# EAGLE board humidity-v2.2 (EAGLE 5.11)
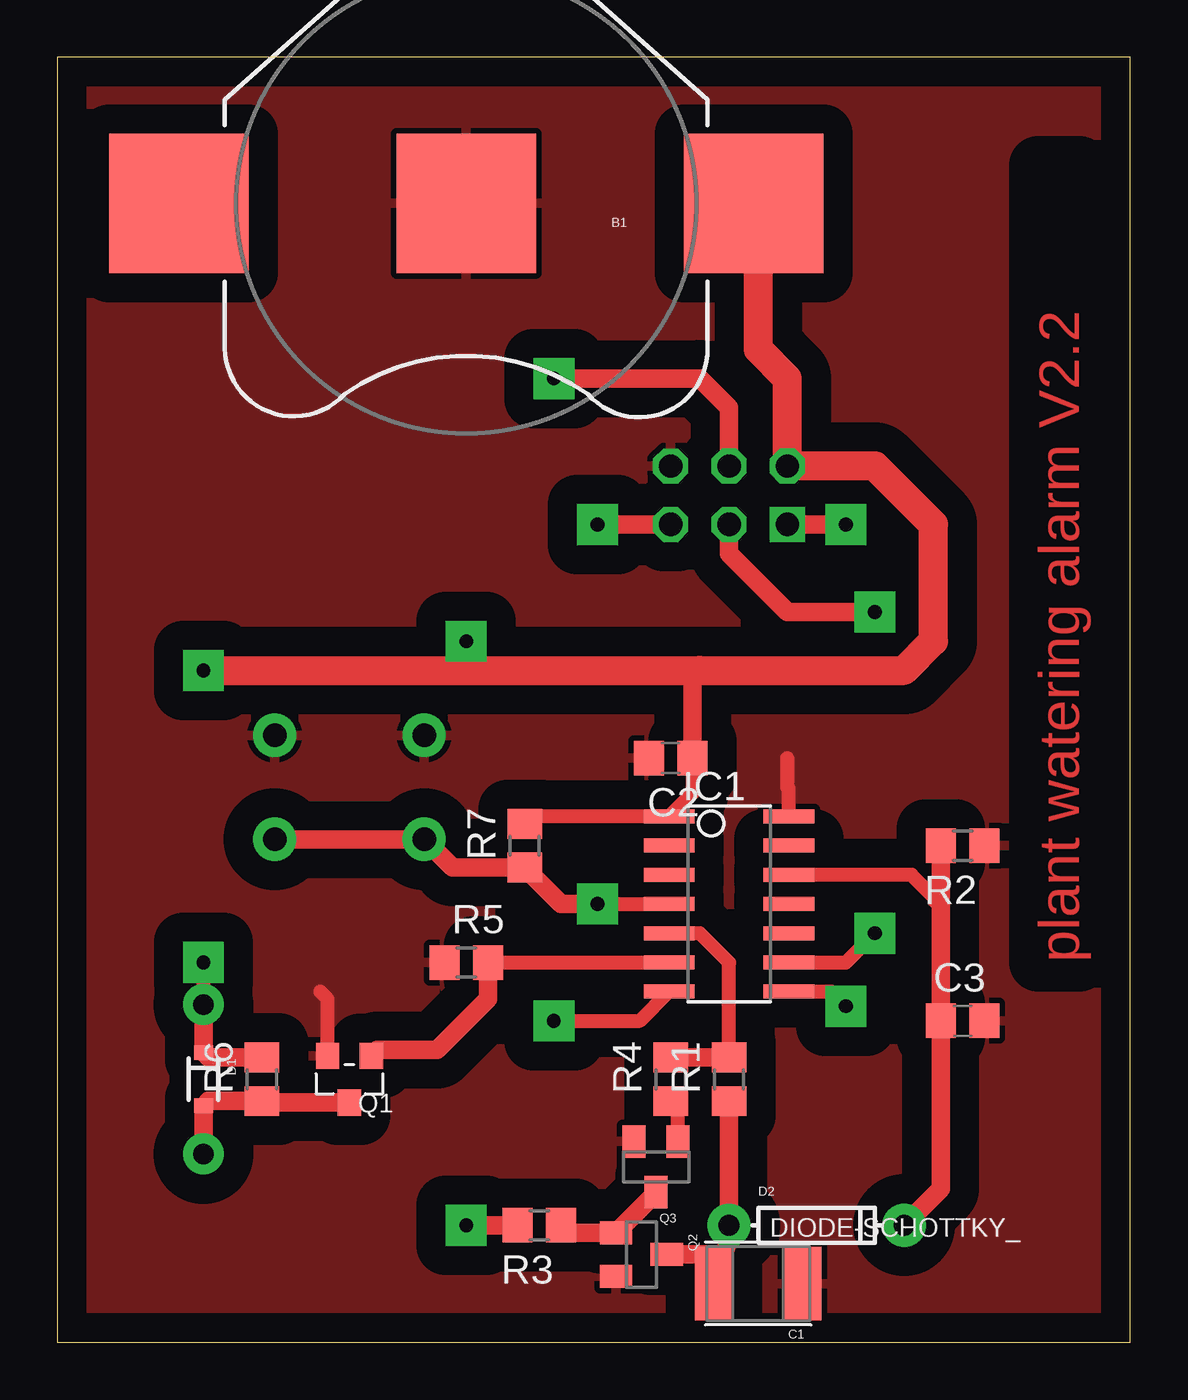
[diagram p0: board, top side]
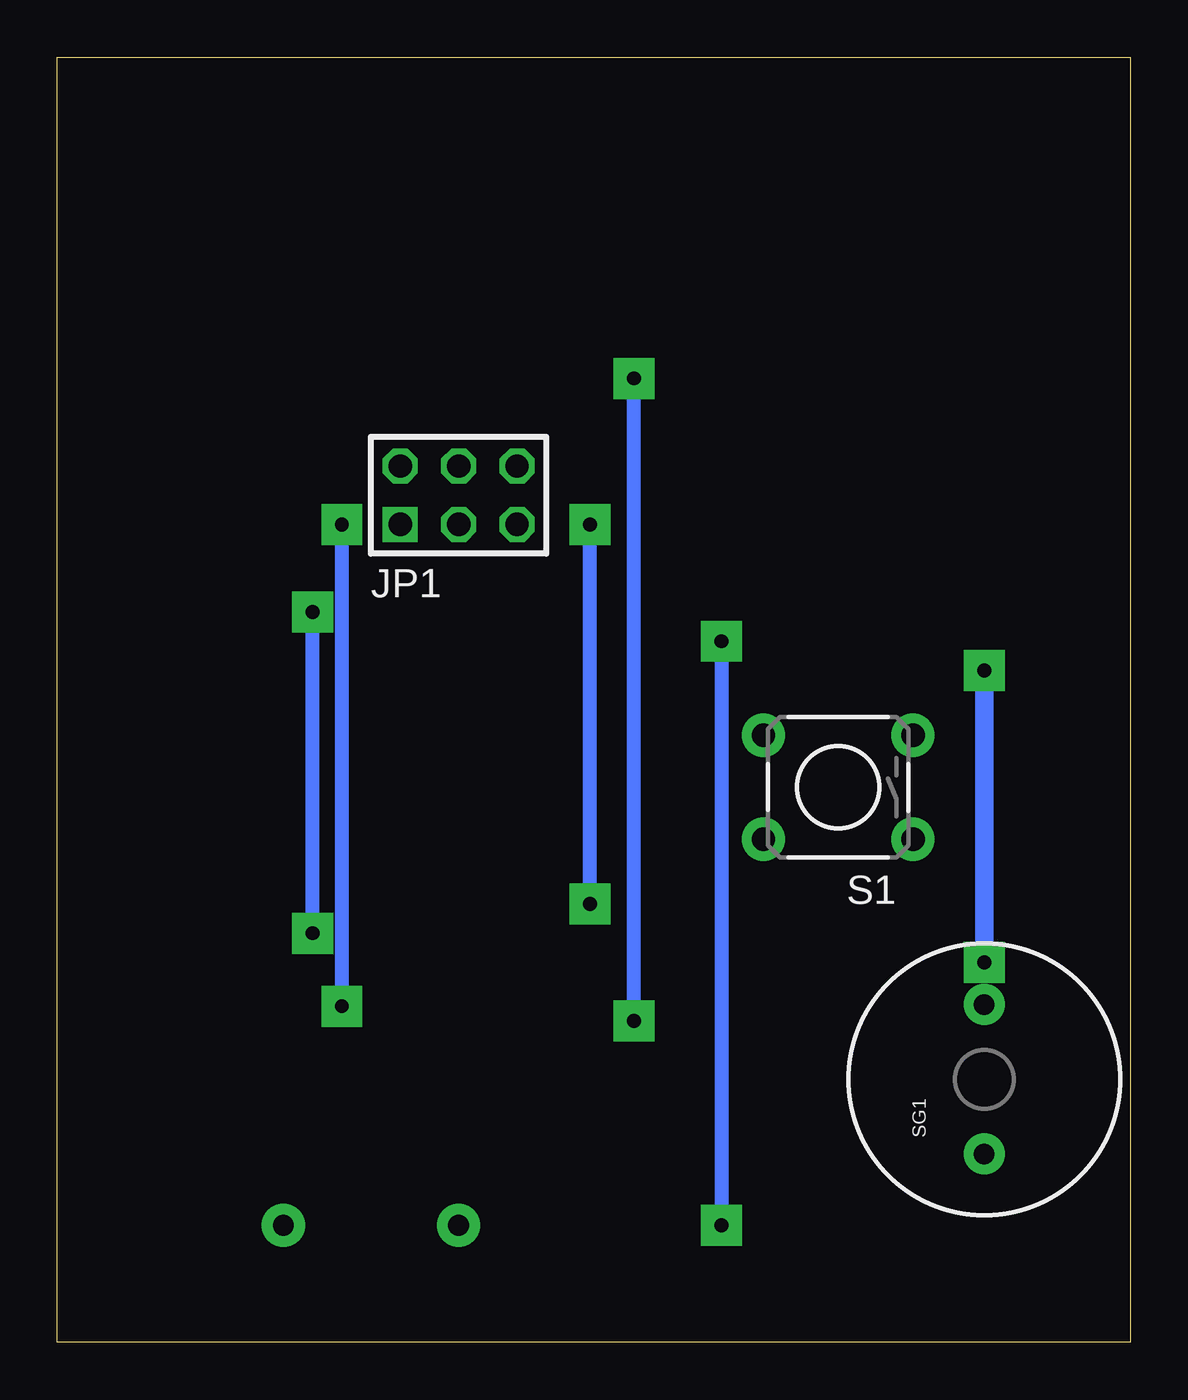
[diagram p1: board, bottom side, seen from below]

Size 46.66 x 55.87 mm. Coordinates in mm from the lower left corner, seen from the top.
Outline: 0,0 46.66,0 46.66,55.87 0,55.87 0,0
Copper layers (1*16): Top 0.035mm / dielectric 1.5mm / Bottom 0.035mm
Design rules "default": minimum track width 10mil, minimum drill 24mil, track to track 8mil, track to pad 8mil, pad to pad 8mil, via to via 8mil, smd to smd 8mil, copper to edge 40mil, drill to drill 8mil, minimum pad ring 10mil, minimum via ring 8mil, stop-mask expansion 4mil, vias tented up to drill 0mil, thermal gap 10mil

## Footprints (pad centres in the part's own frame; a part is rotated, then mirrored left to right if it is on the bottom)
BATTCON_20MM = smd 6.07 x 6.07: 1 -12.5,0; 2 0,0; 3 12.5,0
GRM43D = smd 1.65 x 3.2: A 1.927,0; C -1.927,0
C0805 = smd 1.3 x 1.5: 1 -0.95,0; 2 0.95,0
SOD-323 = smd 0.63 x 0.83: 1 -1.15,0; 2 1.15,0
DIODE-1N4148 = drill 0.9 pad 1.88 round: A -3.81,0; C 3.81,0
SOIC14 = smd 0.61 x 2.21: 1 -3.81,-2.603; 2 -2.54,-2.603; 3 -1.27,-2.603; 4 0,-2.603; 5 1.27,-2.603; 6 2.54,-2.603; 7 3.81,-2.603; 8 3.81,2.603; 9 2.54,2.603; 10 1.27,2.603; 11 0,2.603; 12 -1.27,2.603; 13 -2.54,2.603; 14 -3.81,2.603
AVR-ISP-6 = drill 1.016 square: 1 -2.54,-1.27 | drill 1.016 octagon: 2 -2.54,1.27; 3 0,-1.27; 4 0,1.27; 5 2.54,-1.27; 6 2.54,1.27
SOT23 = smd 1.016 x 1.143: 1 -0.95,-1.016; 2 0.95,-1.016; 3 0,1.016
SOT23' = smd 1 x 1.4: 1 -0.95,-1.1; 2 0.95,-1.1; 3 0,1.1
R0805 = smd 1.3 x 1.5: 1 -0.95,0; 2 0.95,0
TACTILE-PTH = drill 1.016 pad 1.88 round: 1 -3.251,2.261; 2 3.251,2.261; 3 -3.251,-2.261; 4 3.251,-2.261
BUZZER-12MM = drill 0.9 pad 1.778 round: + 3.25,0; - -3.25,0

## Placement (x,y rotation side)
B1  [BATTCON_20MM]  17.78,49.53 180 top
C1  [GRM43D]  30.48,2.54 180 top
C2  100nF  [C0805]  26.67,25.4 180 top
C3  1uF  [C0805]  39.37,13.97 0 top
D1  DIODE-SCHOTTKY_  [SOD-323]  6.35,11.43 270 top
D2  DIODE-SCHOTTKY_  [DIODE-1N4148]  33.02,5.08 0 top
IC1  TINY24/44/84-SSU  [SOIC14]  29.21,19.05 270 top
JP1  AVR-ISP-6  [AVR-ISP-6]  29.21,36.83 0 bottom
Q1  [SOT23]  12.7,11.43 180 top
Q2  [SOT23']  25.4,3.81 270 top
Q3  [SOT23']  26.04,7.62 180 top
R1  1K  [R0805]  29.21,11.43 90 top
R2  1M  [R0805]  39.37,21.59 180 top
R3  10K  [R0805]  20.95,5.08 180 top
R4  10K  [R0805]  26.67,11.43 90 top
R5  10K  [R0805]  17.78,16.51 0 top
R6  1K  [R0805]  8.89,11.43 90 top
R7  10K  [R0805]  20.32,21.59 90 top
S1  SWITCH-MOMENTARY-2PTH  [TACTILE-PTH]  12.7,24.13 180 bottom
SG1  BUZZERPTH  [BUZZER-12MM]  6.35,11.43 90 bottom

## Library data of the parts
B1 C1 D1 D2 Q2 Q3 S1 SG1 = SparkFun
C2 C3 R1-R7 = rcl
IC1 JP1 = avr-5
Q1 = Seeed-Discrete

## Nets
BUZZER: IC1.6 Q1.1 R5.2
CAPACITANCE_V: C3.1 D2.C IC1.12 R2.2
CKOUT: IC1.5 R1.2 R4.2
GND: B1.2 C1.C C2.2 C3.2 IC1.14 JP1.6 Q1.2 Q2.2 Q3.2 R2.1 R5.1 S1.3 S1.4
MISO: IC1.8 JP1.1
MOSI: IC1.7 JP1.4
N$1: D1.2 Q1.3 R6.1 SG1.-
N$3: C1.A D2.A Q2.3 R1.1
N$4: Q2.1 Q3.3 R3.1
N$5: Q3.1 R4.1
RESET: IC1.4 JP1.5 R7.1 S1.1 S1.2
SCK: IC1.9 JP1.3
VCC: B1.1 C2.1 D1.1 IC1.1 JP1.2 R3.2 R6.2 R7.2 SG1.+

## Tracks (layer width: path | path; a pad name or v marks a point on that pad's centre or on a via)
BUZZER
  Top 0.61: R5.2 IC1.6 | Q1.1 13.9,12.7
  Top 0.813: R5.2 18.73,14.92 16.51,12.7 13.9,12.7
CAPACITANCE_V
  Top 0.61: IC1.12 37.15,20.32 38.26,19.21 38.42,19.05 | C3.1 38.1,13.65
  Top 0.813: 38.42,19.05 C3.1 38.42,6.67 D2.C | R2.2 38.42,19.37 38.26,19.21
CKOUT
  Top 0.61: IC1.5 27.94,17.78 29.21,16.51 R1.2
  Top 0.813: R4.2 R1.2
GND
  Top 0.61: IC1.14 31.81,24.07 31.75,24.13 31.75,25.4 | Q1.2 11.75,14.92 11.43,15.24
  pour Top (isolate 1.27): 0,55.88 46.99,55.88 46.99,15.24 46.99,0 0,0
MISO  (via drill 0.6 pad 1.78)
  Top 0.61: IC1.8 33.66,15.24 v34.29,14.61
  Top 0.813: v34.29,35.56 JP1.1
  Bottom 0.61: v34.29,14.61 v34.29,35.56
MOSI  (via drill 0.6 pad 1.78)
  Top 0.61: v21.59,13.97 25.34,13.97 IC1.7
  Top 0.813: JP1.4 29.21,40.64 27.94,41.91 v21.59,41.91
  Bottom 0.61: v21.59,13.97 v21.59,41.91
N$1
  Top 0.61: R6.1 8.96,10.41 | D1.2 6.55,10.48
  Top 0.813: 8.96,10.41 Q1.3 | 6.55,10.48 R6.1 | SG1.- D1.2
N$3
  Top 0.813: R1.1 D2.A 29.21,4.47 28.88,3.49 | 28.88,3.49 C1.A | Q2.3 28.56,3.81 28.88,3.49
N$4
  Top 0.813: Q3.3 26.04,6.5 Q2.1 22.23,4.76 R3.1
N$5
  Top 0.61: Q3.1 26.98,10.16 R4.1
RESET  (via drill 0.6 pad 1.78)
  Top 0.61: v23.5,19.05 IC1.4
  Top 0.813: v23.5,19.05 21.91,19.05 R7.1 17.18,20.64 S1.2 S1.1 | v23.5,35.56 JP1.5
  Bottom 0.61: v23.5,19.05 v23.5,35.56
SCK  (via drill 0.6 pad 1.78)
  Top 0.61: v35.56,17.78 34.29,16.51 IC1.9
  Top 0.813: JP1.3 29.21,34.29 31.75,31.75 v35.56,31.75
  Bottom 0.61: v35.56,17.78 v35.56,31.75
VCC  (via drill 0.6 pad 1.78)
  Top 0.61: R7.2 20.64,22.86 IC1.1 27.62,23.87 C2.1 | D1.1 6.55,12.38 | SG1.+ v6.35,16.51 | 27.94,29.21 27.62,28.89 | 17.78,29.21 v17.78,30.48
  Top 0.813: D1.1 SG1.+ | 6.55,12.38 R6.2 | 27.62,28.89 C2.1 | v17.78,5.08 R3.2
  Top 1.27: v6.35,29.21 17.78,29.21 27.94,29.21 36.83,29.21 38.1,30.48 38.1,35.56 35.56,38.1 JP1.2 31.75,41.91 30.48,43.18 30.48,49.33 B1.1
  Bottom 0.61: v17.78,30.48 v17.78,5.08
  Bottom 0.813: v6.35,16.51 v6.35,29.21

## Text on the board
Top: plant watering alarm V2.2